# Altium PCB fpga_v3.PcbDoc (part 2 of 3)
Units mm, origin at the board's own origin, x right, y up, seen from the top; angles counter-clockwise.
Board outline 160 x 147 mm, 2 copper layers (Top Layer, Bottom Layer); 241 components, 277 nets, 981 pads, 212 vias.
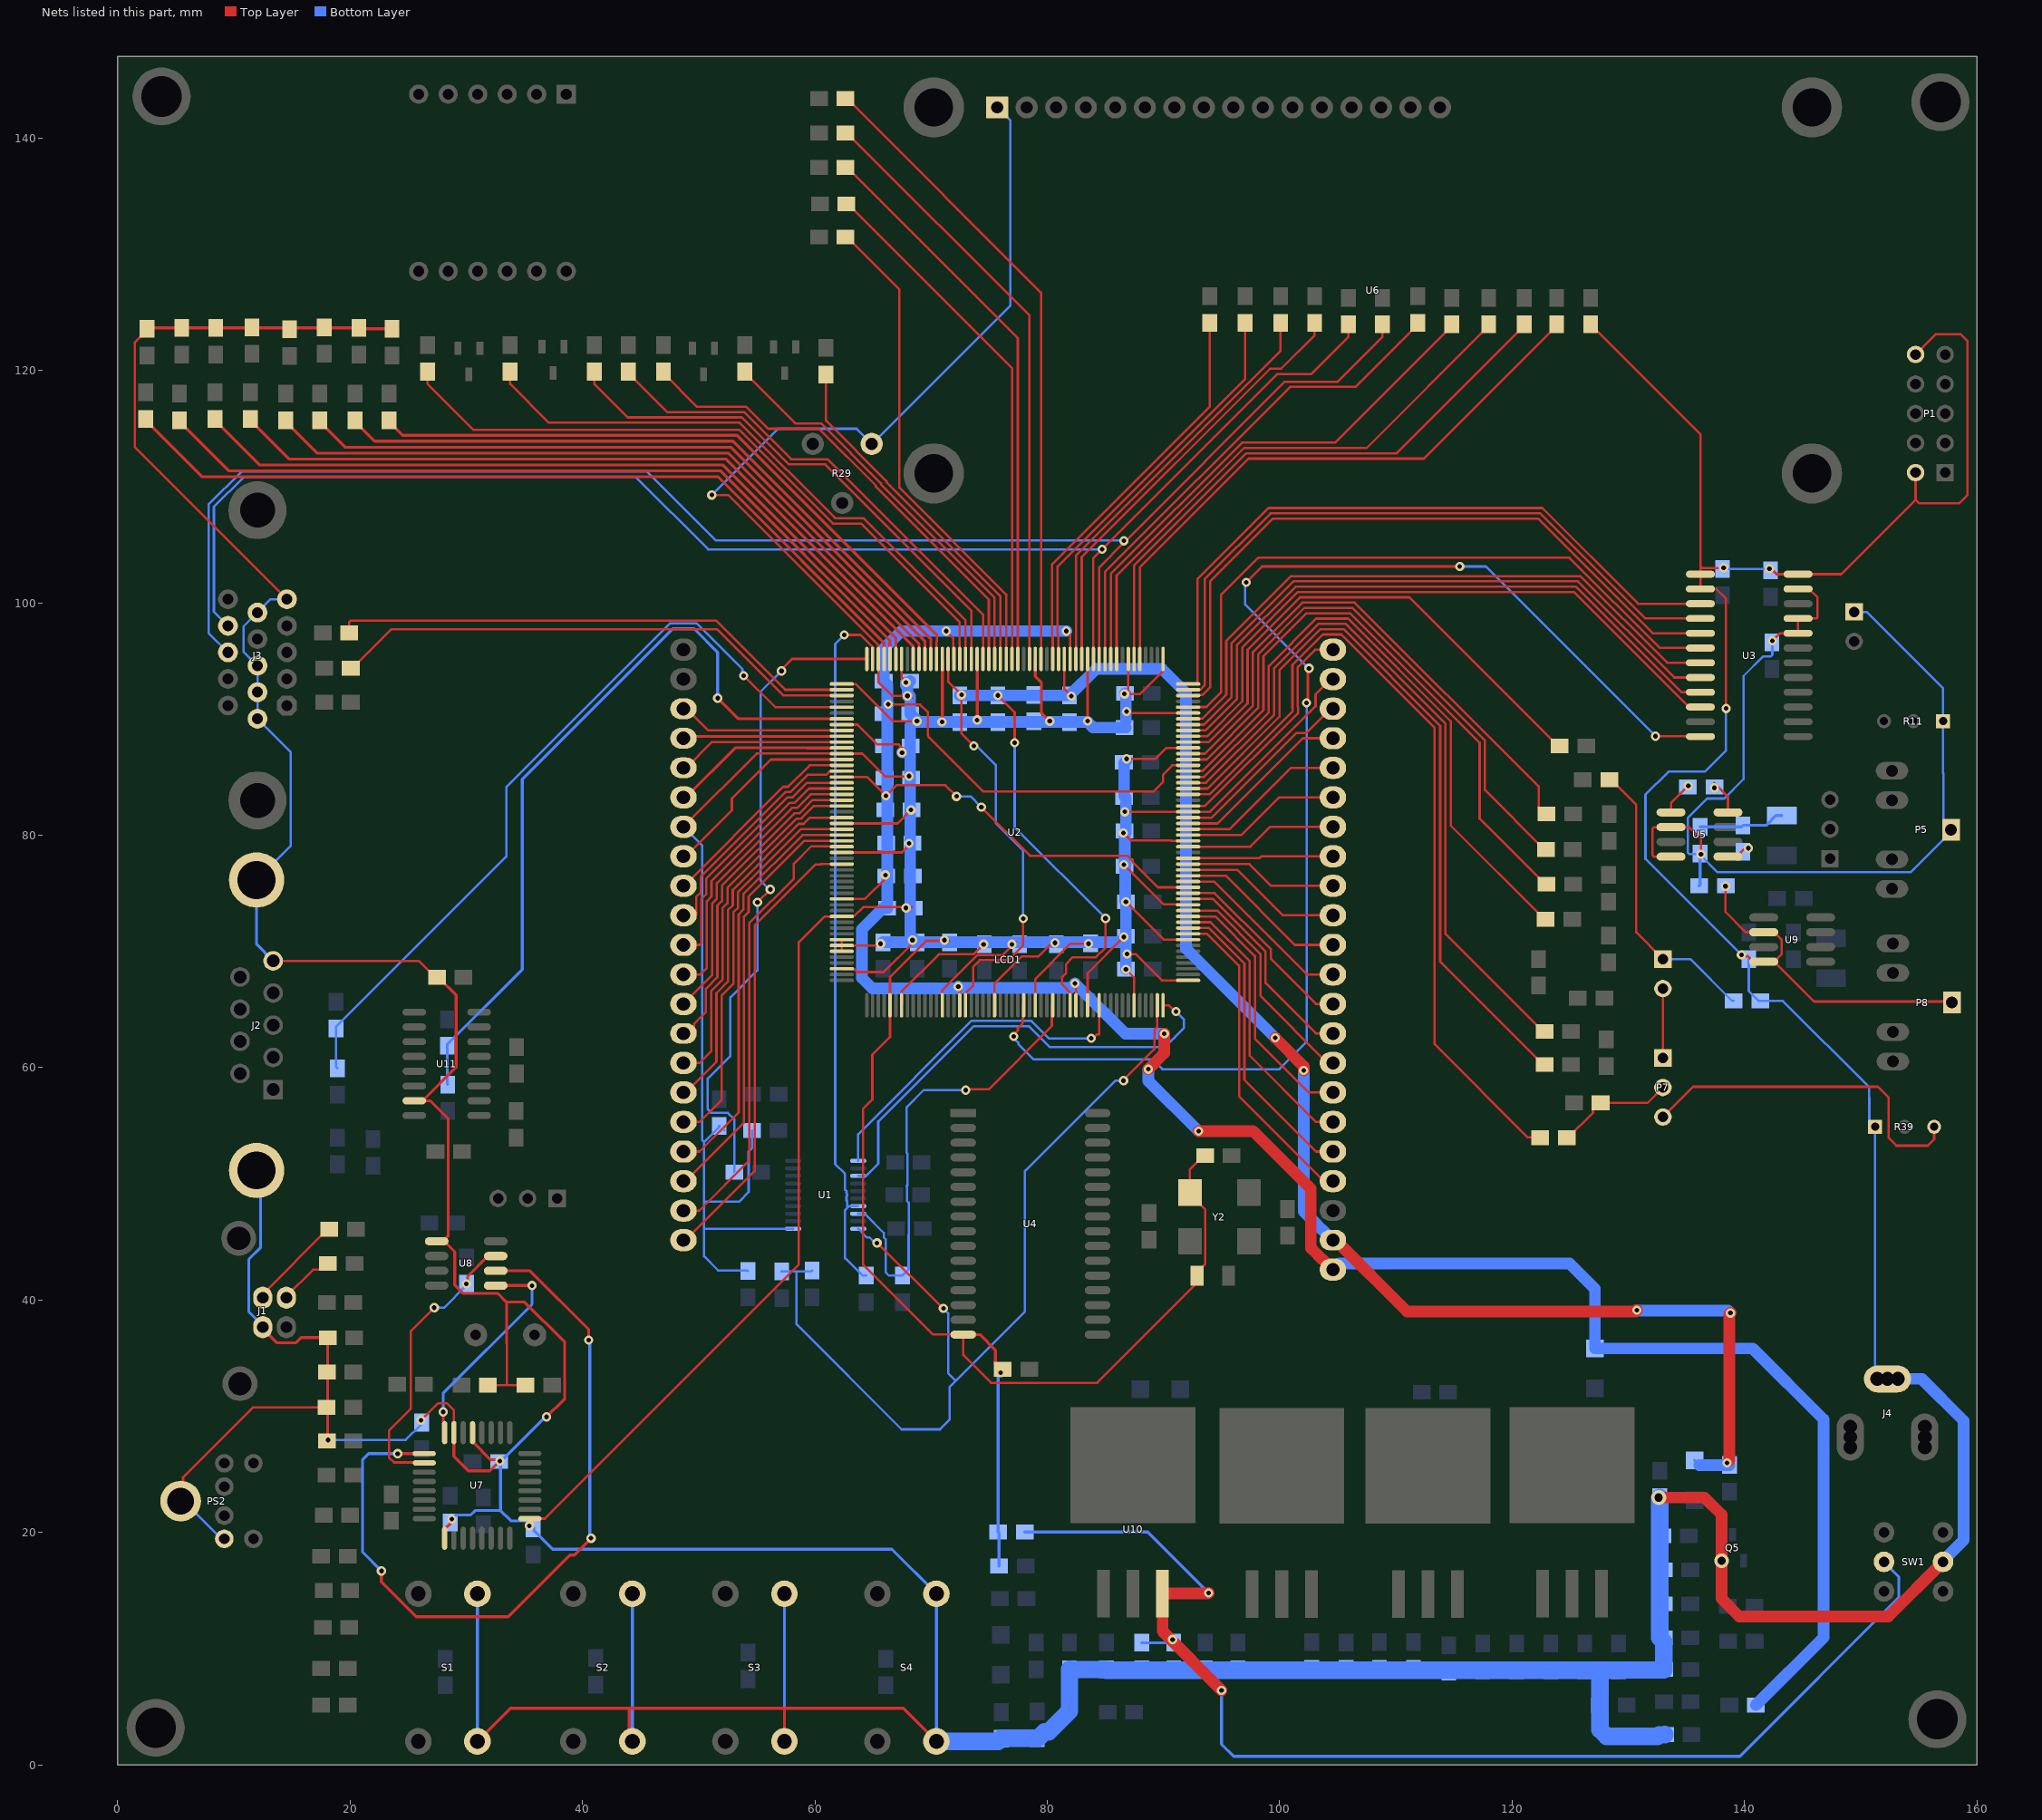
[diagram p2: the nets of this part, all layers, seen from the top]

## Via types
v1: diameter 0.8, hole 0.4, Top Layer to Bottom Layer, 210 vias
v2: diameter 1.27, hole 0.711, Top Layer to Bottom Layer, 2 vias

## Nets (pads, with @x,y where several pads share a name; then routed paths per layer and width w, separated by ;. In a path a pad name is that pad's centre, name@x,y a point inside that pad or via, vN(x,y) a via of type N, cw(c..) or ccw(c..) an arc to the next point about the centre after c; other vN are vias at no path point) (continued)
ADC_CLK: U2.80 U3.12 | length 118.2
  Top Layer w0.203: v1(77.106,62.683) 77.106,62.845 77.465,63.204 77.465,63.397 77.875,63.807 77.875,64.234 77.918,64.277 77.918,64.63 77.923,64.636 77.923,65.321 U2.80@77.966,65.364 ; v1(97.118,101.764) 97.765,102.411 98.478,103.124 v1(115.494,103.124) ; v1(102.311,91.389) 102.422,91.5 102.422,94.269 v1(102.514,94.361) ; v1(132.334,88.519) 132.35,88.503 136.185,88.503 U3.12@136.2,88.488
  Bottom Layer w0.203: v1(77.106,62.683) 77.106,62.56 77.509,62.157 77.509,62.013 78.803,60.719 89.056,60.719 89.904,59.87 99.977,59.87 102.311,62.205 v1(102.311,91.389) ; v1(97.118,101.764) 97.028,101.674 97.028,99.847 v1(102.514,94.361) ; v1(115.494,103.124) 117.729,103.124 v1(132.334,88.519)
ADC_D0: U2.156 U3.3 | length 59
  Top Layer w0.203: U2.156@92.116,93.014 92.87,93.014 92.914,93.059 92.914,102.042 99.025,108.153 122.599,108.153 130.835,99.918 U3.3@136.2,99.918
ADC_D1: U2.155 U3.4 | length 59.5
  Top Layer w0.203: U2.155@92.116,92.514 92.135,92.533 93.173,92.533 93.548,92.908 93.548,102.03 99.215,107.696 122.41,107.696 131.458,98.648 U3.4@136.2,98.648
ADC_D2: U2.154 U3.5 | length 59.8
  Top Layer w0.203: U2.154@92.116,92.014 92.135,92.033 92.735,92.033 92.735,92.062 93.203,92.062 93.216,92.075 93.363,92.075 94.031,92.744 94.031,101.866 99.404,107.239 122.22,107.239 132.082,97.378 U3.5@136.2,97.378
ADC_D3: U2.152 U3.6 | length 57.6
  Top Layer w0.203: U2.152@92.116,91.014 92.135,91.033 93.7,91.033 94.945,92.278 94.945,100.66 98.146,103.861 98.146,103.88 124.933,103.88 132.705,96.108 U3.6@136.2,96.108
ADC_D4: U2.150 U3.7 | length 55
  Top Layer w0.203: U2.150@92.116,90.014 92.135,90.033 93.346,90.033 95.402,92.089 95.402,96.71 100.991,102.298 125.867,102.298 133.328,94.838 U3.7@136.2,94.838
ADC_D5: U2.149 U3.8 | length 55.3
  Top Layer w0.203: U2.149@92.116,89.514 93.474,89.514 95.86,91.899 95.86,96.52 101.181,101.841 125.678,101.841 133.952,93.568 U3.8@136.2,93.568
ADC_D6: U2.148 U3.9 | length 55.7
  Top Layer w0.203: U2.148@92.116,89.014 93.621,89.014 96.317,91.71 96.317,96.331 101.37,101.384 125.489,101.384 134.575,92.298 U3.9@136.2,92.298
ADC_D7: U2.147 U3.10 | length 56
  Top Layer w0.203: U2.147@92.116,88.514 93.767,88.514 96.774,91.521 96.774,96.142 101.559,100.927 125.299,100.927 135.199,91.028 U3.10@136.2,91.028
ADC_GND: C22.1 L1.2 P2.1 P5.1 R10.1 R11.1 U3.20 U3.21 U3.23 U5.2 U5.4 | length 92.1
  Top Layer w0.203: U5.4@133.669,78.156 132.199,78.156 132.08,78.275 132.08,80.577 132.199,80.696 135.223,80.696 136.246,79.674 v1(136.246,78.359) ; v1(142.392,96.723) 143.047,97.378 U3.20@144.6,97.378 U3.21@144.6,98.648 146.155,98.648 146.274,98.767 146.274,100.464 145.55,101.188 U3.23@144.6,101.188
  Bottom Layer w0.203: R10.1@136.169,78.359 136.169,78.308 137.668,76.81 154.292,76.81 157.759,80.277 P5.1@157.759,80.467 157.099,81.128 157.099,85.304 157.074,85.33 157.074,92.622 150.483,99.212 P2.1@149.428,99.212 ; v1(136.246,78.359) 136.22,78.384 135.23,78.384 135.111,78.503 135.111,81.486 136.781,83.156 138.244,83.156 139.913,84.825 139.913,93.705 141.582,95.374 142.237,95.374 142.392,95.529 v1(142.392,96.723)
  Bottom Layer w0.254: L1.2@136.093,75.641 136.169,75.717 R10.1@136.169,78.308
AN0: R74.2 U2.186 | length 34.9
  Top Layer w0.203: R74.2@53.975,119.888 53.975,119.761 58.306,115.43 60.548,115.43 65.707,110.272 65.707,110.176 75.466,100.417 U2.186@75.466,95.164
AN1: R64.2 U2.190 | length 45.7
  Top Layer w0.203: R64.2@41.021,119.888 41.021,118.821 43.891,115.951 53.719,115.951 57.77,111.9 60.892,111.9 73.466,99.326 U2.190@73.466,95.164
AN2: R60.2 U2.191 | length 52
  Top Layer w0.203: R60.2@33.782,119.888 33.782,118.821 37.109,115.494 53.529,115.494 61.746,107.277 64.159,107.277 72.966,98.47 U2.191@72.966,95.164
AN3: R52.2 U2.185 | length 30.7
  Top Layer w0.203: R52.2@60.96,119.634 60.96,115.665 66.164,110.461 66.164,110.365 75.966,100.564 U2.185@75.966,95.164
ANALOG_OUT: P7.2 R12.1 R19.2 | length 10.3
  Top Layer w0.203: R19.2@124.689,53.975 124.816,53.975 126.949,56.109 126.949,56.439 127.483,56.972 131.648,56.972 P7.2@132.969,58.293
ANALOG_OUT1: P7.3 R39.3 | length 29.9
  Top Layer w0.203: P7.3@132.969,55.753 135.576,58.36 151.471,58.36 152.4,57.43 152.4,53.955 153.06,53.294 153.06,53.289 155.753,53.289 156.312,53.848 R39.3@156.312,54.915
ANALOG_OUT2: P6.2 P7.1 | length 6
  Top Layer w0.203: P7.1@132.969,60.833 P6.2@132.969,66.802
BLUE: R65.1 U2.2 | length 45.8
  Top Layer w0.203: R65.1@19.939,97.409 19.939,98.349 20.058,98.468 51.493,98.468 57.447,92.514 U2.2@62.316,92.514
CA: R51.2 U2.187 | length 41.4
  Top Layer w0.203: R51.2@46.965,119.888 46.965,119.761 49.86,116.865 54.098,116.865 55.99,114.973 60.359,114.973 65.25,110.082 65.25,109.987 74.966,100.27 U2.187@74.966,95.164
CB: R53.2 U2.192 | length 58.5
  Top Layer w0.203: R53.2@26.67,119.888 26.67,118.821 30.607,114.884 53.492,114.884 61.557,106.82 63.97,106.82 72.466,98.324 U2.192@72.466,95.164
CC: R54.2 U2.184 | length 42.1
  Top Layer w0.203: R54.2@62.636,131.47 62.763,131.47 67.275,126.958 67.275,109.901 76.466,100.71 U2.184@76.466,95.164
CD: R55.2 U2.183 | length 45.1
  Top Layer w0.203: R55.2@62.713,134.315 62.84,134.315 76.966,120.189 U2.183@76.966,95.164
CE: R56.2 U2.182 | length 48.5
  Top Layer w0.203: R56.2@62.636,137.465 62.763,137.465 77.466,122.762 U2.182@77.466,95.164
CF: R57.2 U2.188 | length 43.1
  Top Layer w0.203: R57.2@43.942,119.888 43.942,119.761 47.295,116.408 53.908,116.408 57.959,112.357 61.082,112.357 74.466,98.973 U2.188@74.466,95.164
CG: R58.2 U2.180 | length 51.9
  Top Layer w0.203: R58.2@62.636,140.411 62.763,140.411 78.466,124.709 U2.180@78.466,95.164
D+: J1.3 R30.1 | length 8.3
  Top Layer w0.203: J1.3@12.497,40.208 12.497,40.513 18.085,46.101 R30.1@18.212,46.101
D-: J1.2 R28.1 | length 4.9
  Top Layer w0.203: J1.2@14.529,40.208 14.529,40.335 16.815,42.621 17.577,42.621 R28.1@18.11,43.155
DAC_D0: R27.1 U2.146 | length 45.1
  Top Layer w0.203: U2.146@92.116,88.014 93.914,88.014 97.231,91.331 97.231,95.952 101.749,100.47 111.163,100.47 123.952,87.681 R27.1@124.079,87.681
DAC_D1: R25.1 U2.144 | length 47.5
  Top Layer w0.203: U2.144@92.116,87.014 93.56,87.014 97.688,91.142 97.688,95.763 101.938,100.013 106.44,100.013 122.301,84.152 122.301,82.372 122.834,81.839 R25.1@122.961,81.839
DAC_D2: R24.1 U2.143 | length 50
  Top Layer w0.203: U2.143@92.116,86.514 93.707,86.514 98.146,90.953 98.146,95.573 102.127,99.555 106.251,99.555 117.653,88.154 117.653,83.896 122.784,78.765 R24.1@122.911,78.765
DAC_D3: R23.1 U2.141 | length 52.7
  Top Layer w0.203: U2.141@92.116,85.514 92.135,85.533 93.372,85.533 98.603,90.763 98.603,95.384 102.317,99.098 106.062,99.098 117.196,87.964 117.196,81.432 122.834,75.794 R23.1@122.961,75.794
DAC_D4: R22.1 U2.140 | length 54.7
  Top Layer w0.203: U2.140@92.116,85.014 93.5,85.014 99.06,90.574 99.06,94.561 103.139,98.641 105.872,98.641 114.723,89.79 114.723,80.806 122.758,72.771 R22.1@122.885,72.771
DAC_D5: R21.1 U2.139 | length 63.8
  Top Layer w0.203: U2.139@92.116,84.514 93.647,84.514 99.517,90.384 99.517,94.372 103.329,98.184 105.683,98.184 114.266,89.601 114.266,71.51 122.657,63.119 R21.1@122.784,63.119
DAC_D6: R20.1 U2.138 | length 66.1
  Top Layer w0.203: U2.138@92.116,84.014 93.793,84.014 99.974,90.195 99.974,94.183 103.518,97.727 105.494,97.727 113.808,89.412 113.808,69.122 122.657,60.274 R20.1@122.784,60.274
DAC_D7: R19.1 U2.137 | length 72.2
  Top Layer w0.203: U2.137@92.116,83.514 93.94,83.514 101.117,90.691 101.117,90.868 101.098,90.887 101.098,94.66 103.708,97.269 105.304,97.269 113.32,89.253 113.32,62.016 121.336,54 122.377,54 R19.1@122.403,53.975
DAC_GND: L3.2 P6.1 R26.1 | length 25
  Top Layer w0.203: R26.1@128.372,84.785 128.499,84.785 130.676,82.608 130.676,71.635 P6.1@132.969,69.342
  Bottom Layer w0.203: P6.1@132.969,69.342 135.331,69.342 138.938,65.735 L3.2@139.065,65.735
DC_IN: C41.1 C42.1 C55.2 SW1.4 U10.3 | length 107.4
  Top Layer w1: v1(93.878,14.808) 93.828,14.757 U10.3@89.916,14.757 89.916,11.506 v1(94.996,6.426)
  Bottom Layer w0.254: C55.2@78.054,20.041 88.646,20.041 v1(93.878,14.808) ; C41.1@88.138,10.516 C42.1@90.5,10.516 ; v1(94.996,6.426) 94.996,1.778 96.037,0.737 139.591,0.737 153.264,14.409 153.264,16.205 SW1.4@151.994,17.475
  other v1: 90.78,10.795
DEV_1: LCD1.3 U2.9 | length 14.4
  Top Layer w0.203: LCD1.3@48.692,90.881 48.946,90.881 50.813,89.014 U2.9@62.316,89.014
DEV_2: LCD1.4 U2.10 | length 13.7
  Top Layer w0.203: LCD1.4@48.692,88.341 48.846,88.495 62.297,88.495 U2.10@62.316,88.514
DEV_3: LCD1.5 U2.11 | length 14.5
  Top Layer w0.203: LCD1.5@48.692,85.801 48.946,85.801 51.159,88.014 U2.11@62.316,88.014
DEV_4: LCD1.6 U2.12 | length 15.4
  Top Layer w0.254: LCD1.6@48.692,83.261 48.882,83.261 53.139,87.518 59.354,87.518 59.357,87.514 U2.12@62.316,87.514
DEV_5: LCD1.8 U2.14 | length 17.7
  Top Layer w0.203: LCD1.8@48.692,78.181 48.882,78.181 52.86,82.159 52.86,83.155 56.219,86.514 58.395,86.514 U2.14@62.316,86.514
DEV_6: LCD1.9 U2.15 | length 17.9
  Top Layer w0.203: LCD1.9@48.692,75.641 48.754,75.641 57.284,84.172 57.705,84.172 59.547,86.014 U2.15@62.316,86.014
DEV_7: LCD1.10 U2.16 | length 20.5
  Top Layer w0.203: LCD1.10@48.692,73.101 49.784,73.101 49.784,74.693 50.19,75.099 50.19,76.431 57.474,83.714 57.894,83.714 59.381,85.201 60.964,85.201 61.229,85.466 62.121,85.466 62.127,85.471 62.316,85.471 U2.16@62.316,85.514
DEV_8: LCD1.11 U2.18 | length 22.4
  Top Layer w0.203: LCD1.11@48.692,70.561 50.071,70.561 50.241,70.731 50.241,74.504 50.648,74.91 50.648,76.242 57.663,83.257 58.084,83.257 59.34,84.514 U2.18@62.316,84.514
DEV_9: LCD1.12 U2.19 | length 24.4
  Top Layer w0.203: LCD1.12@48.692,68.021 50.14,68.021 50.698,68.58 50.698,74.314 51.105,74.721 51.105,76.052 57.852,82.8 58.273,82.8 59.487,84.014 U2.19@62.316,84.014
DEV_10: LCD1.13 U2.20 | length 25.5
  Top Layer w0.203: LCD1.13@48.692,65.481 48.692,65.504 51.156,67.968 51.156,74.125 51.562,74.531 51.562,75.863 58.042,82.343 58.462,82.343 59.634,83.514 U2.20@62.316,83.514
DEV_11: LCD1.14 U2.21 | length 28.2
  Top Layer w0.203: LCD1.14@48.692,62.941 49.733,62.941 49.733,63.267 49.608,63.392 49.608,63.771 49.876,64.039 50.622,64.785 50.622,66.788 51.613,67.779 51.613,73.935 52.019,74.342 52.019,75.674 58.231,81.886 58.652,81.886 59.78,83.014 U2.21@62.316,83.014
DEV_12: LCD1.15 U2.22 | length 30.2
  Top Layer w0.203: LCD1.15@48.692,60.401 50.071,60.401 51.079,61.409 51.079,66.599 52.07,67.589 52.07,73.746 52.476,74.152 52.476,75.484 58.42,81.428 58.841,81.428 59.927,82.514 U2.22@62.316,82.514
DEV_13: LCD1.16 U2.24 | length 31.3
  Top Layer w0.203: LCD1.16@48.692,57.861 48.882,57.861 51.537,60.515 51.537,66.409 52.527,67.4 52.527,73.557 52.934,73.963 52.934,75.295 58.61,80.971 59.03,80.971 59.573,81.514 U2.24@62.316,81.514
DEV_14: LCD1.17 U2.26 | length 33.7
  Top Layer w0.203: LCD1.17@48.692,55.321 50.071,55.321 51.994,57.244 51.994,66.22 52.984,67.211 52.984,73.367 53.391,73.774 53.391,75.106 58.799,80.514 59.22,80.514 U2.26@62.316,80.514
DEV_15: LCD1.18 U2.27 | length 35.7
  Top Layer w0.203: LCD1.18@48.692,52.781 50.071,52.781 53.442,56.151 53.442,67.021 53.442,73.178 53.848,73.584 53.848,74.916 58.946,80.014 59.366,80.014 U2.27@62.316,80.014
DEV_16: LCD1.19 U2.28 | length 36.9
  Top Layer w0.203: LCD1.19@48.692,50.241 48.882,50.241 53.899,55.258 53.899,72.989 54.077,73.166 54.305,73.395 54.305,74.727 59.092,79.514 U2.28@62.316,79.514
DEV_17: LCD1.20 U2.29 | length 39.4
  Top Layer w0.203: LCD1.20@48.692,47.701 50.071,47.701 54.356,51.986 54.356,72.423 58.185,76.252 58.185,77.539 59.702,79.057 61.347,79.057 61.39,79.014 U2.29@62.316,79.014
DEV_18: LCD1.22 U2.135 | length 20.4
  Top Layer w0.203: U2.135@92.116,82.514 93.587,82.514 101.575,90.502 101.575,91.057 101.556,91.076 101.556,94.471 103.046,95.961 LCD1.22@104.572,95.961
DEV_19: LCD1.24 U2.133 | length 16.3
  Top Layer w0.203: U2.133@92.116,81.514 94.147,81.514 101.432,88.798 102.298,88.798 104.381,90.881 LCD1.24@104.572,90.881
DEV_20: LCD1.25 U2.132 | length 15.5
  Top Layer w0.203: U2.132@92.116,81.014 94.664,81.014 101.992,88.341 LCD1.25@104.572,88.341
DEV_21: LCD1.26 U2.131 | length 14.6
  Top Layer w0.203: U2.131@92.116,80.514 95.684,80.514 100.972,85.801 LCD1.26@104.572,85.801
DEV_22: LCD1.27 U2.130 | length 13.8
  Top Layer w0.203: U2.130@92.116,80.014 96.704,80.014 99.952,83.261 LCD1.27@104.572,83.261
DEV_23: LCD1.28 U2.128 | length 13.2
  Top Layer w0.203: U2.128@92.116,79.014 97.474,79.014 99.182,80.721 LCD1.28@104.572,80.721
DEV_24: LCD1.29 U2.126 | length 12.5
  Top Layer w0.203: U2.126@92.116,78.014 98.244,78.014 98.412,78.181 LCD1.29@104.572,78.181
DEV_25: LCD1.30 U2.125 | length 13.2
  Top Layer w0.203: U2.125@92.116,77.514 97.392,77.514 99.264,75.641 LCD1.30@104.572,75.641
DEV_26: LCD1.31 U2.124 | length 14.1
  Top Layer w0.203: U2.124@92.116,77.014 96.372,77.014 100.284,73.101 LCD1.31@104.572,73.101
DEV_27: LCD1.32 U2.123 | length 14.9
  Top Layer w0.203: U2.123@92.116,76.514 95.352,76.514 101.304,70.561 LCD1.32@104.572,70.561
DEV_28: LCD1.33 U2.122 | length 15.8
  Top Layer w0.203: U2.122@92.116,76.014 94.332,76.014 102.324,68.021 LCD1.33@104.572,68.021
DEV_29: LCD1.34 U2.120 | length 16.9
  Top Layer w0.203: U2.120@92.116,75.014 94.402,75.014 99.246,70.17 99.246,69.359 103.124,65.481 LCD1.34@104.572,65.481
DEV_30: LCD1.35 U2.119 | length 18.8
  Top Layer w0.203: U2.119@92.116,74.514 94.255,74.514 98.789,69.98 98.789,67.276 103.124,62.941 LCD1.35@104.572,62.941
DEV_31: LCD1.36 U2.117 | length 20
  Top Layer w0.203: U2.117@92.116,73.514 94.608,73.514 98.332,69.791 98.332,66.184 104.115,60.401 LCD1.36@104.572,60.401
DEV_32: LCD1.37 U2.116 | length 22.9
  Top Layer w0.203: U2.116@92.116,73.014 94.462,73.014 97.874,69.601 97.874,62.476 102.489,57.861 LCD1.37@104.572,57.861
DEV_33: LCD1.38 U2.115 | length 24.3
  Top Layer w0.203: U2.115@92.116,72.514 94.051,72.514 97.417,69.148 97.417,61.028 103.124,55.321 LCD1.38@104.572,55.321
DEV_34: LCD1.39 U2.114 | length 26.3
  Top Layer w0.203: U2.114@92.116,72.014 93.904,72.014 96.96,68.959 96.96,58.945 103.124,52.781 LCD1.39@104.572,52.781
DEV_35: LCD1.40 U2.113 | length 27.9
  Top Layer w0.203: U2.113@92.116,71.514 93.758,71.514 96.503,68.769 96.503,57.523 103.784,50.241 LCD1.40@104.572,50.241
DP: R59.2 U2.178 | length 55.3
  Top Layer w0.203: R59.2@62.636,143.383 62.763,143.383 79.466,126.68 U2.178@79.466,95.164
EECS: U7.32 U8.1 | length 18.9
  Top Layer w0.254: v1(28.016,30.378) 28.016,29.556 28.145,29.427 U7.32@28.145,28.599 ; U8.1@32.537,41.25 v1(35.662,41.25)
  Bottom Layer w0.254: v1@28.156,30.543 28.103,30.543 28.016,30.631 28.016,31.991 35.662,39.637 v1(35.662,41.25)
EEDATA: R43.2 U7.2 U8.3 | length 24.9
  Top Layer w0.203: U7.2@26.391,25.995 26.358,26.029 23.792,26.029 23.349,26.471 23.349,28.757 25.245,30.653 25.245,37.335 v1(27.254,39.345)
  Top Layer w0.254: v1@30.124,41.681 30.124,42.037 31.877,43.79 U8.3@32.537,43.79
  Bottom Layer w0.203: v1(27.254,39.345) 28.092,39.345 30.023,41.275 v1(30.023,41.402)
EESK: U7.1 U8.2 | length 66.9
  Top Layer w0.254: v1(22.708,16.688) 22.708,15.752 25.709,12.751 33.601,12.751 38.909,18.059 39.296,18.059 v1(40.742,19.506) ; v1(24.105,26.784) 24.11,26.79 26.385,26.79 U7.1@26.391,26.795 ; U8.2@32.537,42.52 35.496,42.52 40.538,37.477 v1(40.538,36.551)
  Bottom Layer w0.254: v1(22.708,16.688) 21.087,18.308 21.087,26.275 21.597,26.784 v1(24.105,26.784) ; v1(40.538,36.551) 40.64,36.449 40.64,19.608 v1(40.742,19.506)
ForClock: LCD1.21 U2.32 | length 39.4
  Top Layer w0.203: LCD1.21@48.692,45.161 48.882,45.161 54.813,51.092 54.813,72.234 60.071,77.492 60.522,77.492 60.544,77.514 U2.32@62.316,77.514
FPGA-CCLK: U1.3 U2.104 | length 39.9
  Top Layer w0.203: U2.104@89.966,65.364 90.462,65.364 90.995,64.83 v1(91.068,64.83)
  Bottom Layer w0.203: U1.3@63.729,50.687 64.403,50.687 65.456,51.74 65.456,55.36 73.654,63.559 78.441,63.559 80.232,61.767 90.114,61.767 90.407,62.06 90.424,62.06 90.926,62.561 90.926,62.579 91.745,63.398 91.745,64.154 v1(91.068,64.83)
FPGA-DIN: U1.1 U2.93 | length 30.3
  Top Layer w0.203: v1(83.781,62.523) 83.943,62.523 84.296,62.876 84.466,62.876 U2.93@84.466,65.364
  Bottom Layer w0.203: U1.1@63.729,51.987 63.729,54.28 73.465,64.016 78.63,64.016 80.123,62.523 v1(83.781,62.523)
FPGA-DONE: R1.1 R9.2 U1.10 U2.103 | length 84.8
  Top Layer w0.203: v1(65.348,44.914) 65.387,44.914 71.018,39.282 v1(71.057,39.282) ; v1(86.563,58.882) 86.563,58.935 89.214,61.586 89.214,63.27 89.466,63.522 U2.103@89.466,65.364
  Bottom Layer w0.203: R9.2@57.15,42.469 58.42,42.469 ; R1.1@59.766,42.545 59.69,42.469 58.42,42.469 ; U1.10@63.729,46.137 64.459,45.406 64.693,45.406 65.186,44.914 v1(65.348,44.914) ; v1(71.057,39.282) 71.476,38.864 71.476,33.706 72.123,33.058 ; v1(86.563,58.882) 85.857,58.882 78.08,51.105 78.08,39.014 72.123,33.058 ; 58.42,42.469 58.42,37.922 67.462,28.88 70.764,28.88 71.603,29.718 71.603,32.537 72.123,33.058
FPGA-INITb: R2.1 U1.8 U2.85 | length 39.6
  Top Layer w0.203: v1@73.304,58.141 74.953,58.141 80.391,63.578 80.391,64.25 80.418,64.277 80.418,65.169 80.423,65.175 80.423,65.321 U2.85@80.466,65.364
  Bottom Layer w0.203: U1.8@63.729,47.437 64.278,47.437 65.942,45.773 65.942,45.388 66.103,45.227 66.103,42.38 66.37,42.113 R2.1@67.539,42.113 68.069,42.643 68.069,45.615 68.097,45.644 68.097,48.265 68.075,48.287 68.075,48.381 67.916,48.539 67.916,49.807 67.904,49.819 67.967,49.882 67.967,52.601 67.894,52.674 67.894,56.591 69.367,58.064 v1(72.974,58.064)
FPGA-PROGb: R3.1 U1.7 U2.207 | length 61.8
  Top Layer w0.203: v1(62.535,97.231) 63.937,97.231 64.918,96.251 64.918,95.89 64.966,95.841 U2.207@64.966,95.164
  Bottom Layer w0.203: v1(62.535,97.231) 61.747,96.444 61.747,51.705 62.556,50.897 62.603,50.85 62.603,49.487 62.727,49.363 62.727,49.189 62.774,49.142 62.774,48.982 62.727,48.934 62.727,48.539 62.774,48.492 62.774,47.915 ; U1.7@63.729,48.087 62.946,48.087 62.774,47.915 ; R3.1@64.414,42.113 64.11,42.113 62.603,43.62 62.603,47.744 62.774,47.915
FPGA-TDI: R8.1 U2.208 | length 56.2
  Top Layer w0.203: v1(55.061,74.219) 55.061,74.228 56.159,75.327 v1(56.159,75.336) ; v1@56.82,93.955 58.029,95.164 U2.208@64.466,95.164
  Bottom Layer w0.203: R8.1@53.086,51.003 53.086,55.55 52.527,56.109 51.079,56.109 50.927,56.261 50.927,56.292 50.829,56.39 50.775,56.445 50.775,59.055 52.73,61.011 52.73,66.04 55.061,68.37 v1(55.061,74.219) ; v1@55.956,75.463 55.332,76.088 55.332,92.34 v1(57.125,94.132)
FPGA_1.25V: C2.2 C3.2 C4.2 C5.2 L9.2 LCD1.42 R98.1 U2.70 U2.88 U2.174 U2.194 | length 200
  Top Layer w0.203: U2.194@71.466,95.164 71.466,93.228 v1(72.619,92.075) 72.619,88.748 v1(73.685,87.681) ; U2.70@72.966,65.364 72.966,65.549 73.014,65.598 73.014,66.451 73.609,67.046 73.609,68.67 74.18,69.24 76.659,69.24 77.275,69.856 77.927,70.509 v1(77.927,72.831) ; v1(75.743,92.024) 77.191,90.576 v1(77.191,87.96) ; U2.174@81.466,95.164 81.466,92.575 v1(82.067,91.973) ; U2.88@81.966,65.364 81.966,66.472 81.28,67.158 81.28,67.791 81.604,68.115 81.604,68.904 82.194,69.494 84.176,69.494 85.014,70.333 v1(85.014,72.847) ; LCD1.42@104.572,45.161 LCD1.42@104.826,45.161 ; v1(138.481,25.984) v1@138.684,26.187
  Top Layer w1: v1(99.619,62.56) 102.057,60.122 v1(102.057,59.766) ; LCD1.42@104.826,45.161 110.965,39.022 130.615,39.022 v1(130.734,39.141) ; v1@138.684,26.187 138.684,38.786 v1(138.786,38.887)
  Bottom Layer w0.203: v1@73.609,88.011 75.565,86.055 75.565,81.051 77.927,78.689 v1(77.927,72.831) ; v1(77.191,87.96) 77.191,80.67 v1(85.014,72.847)
  Bottom Layer w0.254: L9.2@135.687,26.213 L9.2@136.093,25.806
  Bottom Layer w1: C5.2@72.466,92.024 v1(75.743,92.024) C2.2@81.915,92.024 84.201,94.31 89.865,94.31 91.923,92.253 91.923,70.256 v1(99.619,62.56) ; v1(102.057,59.766) 102.057,47.638 102.902,46.793 103.637,46.058 103.675,46.058 LCD1.42@104.572,45.161 ; v1(130.734,39.141) 130.785,39.091 138.582,39.091 v1(138.786,38.887) ; L9.2@136.093,25.806 R98.1@138.709,25.806
FPGA_2.5V: C6.2 C7.2 C8.2 C9.2 C10.2 C11.2 C12.2 C13.2 D13.1 L7.2 LCD1.43 U2.17 U2.38 U2.69 U2.89 U2.121 U2.142 U2.173 U2.193 | length 261.4
  Top Layer w0.203: U2.38@62.316,74.514 64.303,74.514 v1@66.218,76.429 ; U2.17@62.316,85.014 64.49,85.014 v1(66.116,83.388) 67.031,84.303 71.222,84.303 v1(72.187,83.337) ; v1(66.308,91.276) 66.308,91.237 69.05,91.237 69.729,90.557 69.729,88.603 69.748,88.584 69.748,88.494 74.488,83.754 89.138,83.754 89.967,84.582 89.967,85.217 90.764,86.014 U2.142@92.116,86.014 ; v1@71.291,97.555 71.918,96.928 71.918,95.359 71.923,95.353 71.923,95.207 U2.193@71.966,95.164 ; v1(72.338,66.977) 72.338,66.865 72.484,66.719 72.484,66.591 72.466,66.573 U2.69@72.466,65.364 ; v1(74.32,82.423) 78.518,78.226 86.902,78.226 87.344,77.783 87.344,77.68 89.51,75.514 U2.121@92.116,75.514 ; v1(81.636,97.561) 81.966,97.231 U2.173@81.966,95.164 ; v1(82.387,67.248) 82.466,67.248 U2.89@82.466,65.364
  Top Layer w1: v1(88.701,59.863) 90.07,61.232 v1(90.07,62.916) ; v1(93.015,54.534) 93.269,54.534 95.292,54.534 97.714,54.534 102.675,49.573 102.675,49.09 102.675,45.128 102.675,44.481 102.839,44.317 103.637,43.518 103.675,43.518 LCD1.43@104.572,42.621
  Bottom Layer w0.203: v1(72.187,83.337) 73.406,83.337 v1(74.32,82.423)
  Bottom Layer w1: v1(66.308,91.276) v1@66.228,91.276 ; v1@70.942,97.561 67.437,97.561 65.923,96.047 C6.2@65.923,93.25 66.228,92.945 v1@66.228,91.276 ; v1(71.298,97.561) v1(81.636,97.561) ; v1(72.338,66.977) 72.189,66.827 64.948,66.827 64.059,67.716 64.059,71.907 65.869,73.718 C13.2@66.228,73.718 66.228,91.196 66.243,91.211 66.228,91.227 v1@66.228,91.276 ; 72.746,66.853 81.991,66.853 v1(82.387,67.248) 86.719,62.916 v1(90.07,62.916) ; v1(88.701,59.863) 88.701,58.847 v1(93.015,54.534) ; LCD1.43@104.572,42.621 105.105,43.155 124.943,43.155 127.127,40.97 L7.2@127.127,35.839 140.691,35.839 146.787,29.743 146.787,10.96 D13.1@140.97,5.143
  other v1: 66.065,76.581
FPGA_LED1: R66.1 U2.205 | length 73
  Top Layer w0.254: R66.1@2.413,115.824 2.413,115.697 7.264,110.846 51.652,110.846 65.943,96.555 65.943,96.099 65.966,96.076 U2.205@65.966,95.164
FPGA_LED2: R67.1 U2.204 | length 69.5
  Top Layer w0.254: R67.1@5.334,115.697 5.334,115.57 9.55,111.354 51.863,111.354 66.451,96.765 66.451,96.291
FPGA_LED3: R68.1 U2.203 | length 68.3
  Top Layer w0.254: R68.1@8.382,115.824 8.382,115.697 12.217,111.862 52.073,111.862 66.966,96.969 U2.203@66.966,95.164
FPGA_LED4: R69.1 U2.200 | length 66.3
  Top Layer w0.254: R69.1@11.43,115.824 11.43,115.697 14.757,112.37 52.335,112.37 68.443,96.262 68.443,96.099 68.457,96.085 68.457,95.173 U2.200@68.466,95.164
FPGA_LED5: R70.1 U2.199 | length 62.8
  Top Layer w0.254: R70.1@14.478,115.697 14.478,115.57 17.17,112.878 52.545,112.878 68.965,96.458 U2.199@68.965,96.164
FPGA_LED6: R71.1 U2.198 | length 61.5
  Top Layer w0.254: R71.1@17.399,115.697 17.399,115.57 19.583,113.386 52.756,113.386 69.473,96.668 69.473,95.171 U2.198@69.466,95.164
FPGA_LED7: R72.1 U2.197 | length 58.1
  Top Layer w0.254: R72.1@20.447,115.697 20.447,115.57 22.123,113.894 52.966,113.894 69.981,96.879 U2.197@69.981,96.164
FPGA_LED8: R73.1 U2.196 | length 56.9
  Top Layer w0.203: U2.196@70.466,95.164 70.466,96.645 70.489,96.668 70.489,97.205
  Top Layer w0.254: R73.1@23.368,115.697 23.368,115.57 24.536,114.402 53.293,114.402 70.489,97.205
FPGA_RX: D15.2 R81.1 U2.7 | length 67.3
  Top Layer w0.254: v1(51.638,91.796) 53.42,90.014 U2.7@62.316,90.014
  Bottom Layer w0.254: D15.2@28.41,58.547 28.372,58.585 28.372,62.001 34.823,68.453 34.823,84.816 47.76,97.752 49.624,97.752 51.638,95.738 v1(51.638,91.796)
FPGA_TX: D14.2 R79.1 U2.5 | length 68.3
  Top Layer w0.203: v1(53.873,93.726) 56.585,91.014 U2.5@62.316,91.014
  Bottom Layer w0.203: D14.2@18.923,59.944 18.796,60.071 18.796,63.5 33.445,78.149 33.445,84.119 47.56,98.234 49.824,98.234 53.759,94.299 53.759,93.84 v1(53.873,93.726)
GND: C1.1 C2.1 C3.1 C4.1 C5.1 C6.1 C7.1 C8.1 C9.1 C10.1 C11.1 C12.1 C13.1 C14.1 C15.1 C16.1 C17.1 C18.1 C19.1 C20.1 C21.1 C23.1 C24.1 C27.1 C29.1 C30.2 C31.1 C32.2 C33.2 C34.2 C37.1 C39.2 C40.2 C41.2 C42.2 C43.2 C44.2 C45.2 C49.2 C50.2 C51.2 C52.2 C53.2 C54.1 C55.1 C56.2 C57.2 C58.2 C59.2 C60.2 C61.1 C62.2 C63.1 C64.1 C65.1 C66.1 C67.1 C68.2 C69.2 C70.2 C71.2 C72.1 C73.1 C74.1 C75.1 D1.2 D3.2 D4.2 D5.2 D6.2 D7.2 D8.2 D9.2 D10.2 J1.4 J2.5 J2.10 J2.11 J3.5 J3.6 J3.7 J3.8 J3.10 J4.2 L1.1 L3.1 LCD1.7 LCD1.23 P1.2 P1.10 P8.1 PS2.3 PS2.S Q5.2 R29.1 R33.1 R34.1 R38.1 R39.1 R62.1 R63.1 R78.1 R80.1 R85.1 R88.1 R102.2 R103.1 S1.2 S1.4 S2.2 S2.4 S3.2 S3.4 S4.2 S4.4 SW1.3 U1.11 U2.1 U2.8 U2.13 U2.25 U2.30 U2.41 U2.45 U2.46 U2.47 U2.50 U2.57 U2.59 U2.66 U2.75 U2.82 U2.91 U2.99 U2.105 U2.112 U2.118 U2.129 U2.134 U2.145 U2.151 U2.157 U2.163 U2.170 U2.179 U2.189 U2.195 U2.202 U2.206 U3.1 U3.2 U3.24 U4.16 U6.1 U7.9 U7.17 U7.29 U7.31 U8.5 U9.2 U9.4 U11.15 Y2.2 | length 1332.9
  Top Layer w0.203: D3.2@2.54,123.571 2.54,123.444 1.476,122.38 1.476,113.408 J3.5@14.58,100.305 ; PS2.S@5.436,22.708 5.638,22.91 5.638,24.762 11.635,30.759 C33.2@17.983,30.759 ; J2.5@13.384,69.192 25.931,69.192 27.356,67.767 C54.1@27.483,67.767 ; C34.2@18.009,27.889 C34.2@18.085,27.965 ; v1(26.111,29.667) 27.578,31.134 28.329,31.134 28.945,30.518 U7.31@28.945,28.599 ; C37.1@31.877,32.69 33.49,32.69 ; 33.477,39.827 33.477,36.265 33.49,36.252 33.49,32.69 ; C31.1@35.103,32.69 33.49,32.69 ; U7.17@35.473,21.195 35.531,21.195 36.765,21.195 58.623,43.053 58.623,70.8 60.838,73.014 U2.41@62.316,73.014 62.359,73.057 62.505,73.057 62.511,73.062 63.403,73.062 64.153,73.812 68.351,73.812 ; LCD1.7@48.692,80.721 55.002,87.031 57.512,87.031 57.516,87.035 58.52,87.035 58.524,87.031 62.695,87.031 62.713,87.014 64.091,87.014 66.065,85.039 v1@68.301,85.039 ; v1(51.13,109.271) 52.544,109.271 65.447,96.368 65.447,95.183 U2.206@65.466,95.164 65.466,93.186 66.66,91.992 67.824,91.992 v1@67.97,91.846 ; U2.50@62.316,68.514 62.359,68.471 62.505,68.471 62.511,68.466 63.403,68.466 63.644,68.224 65.938,68.224 v1@68.529,70.815 ; U2.47@62.316,70.014 U2.46@62.316,70.514 ; U2.45@62.316,71.014 U2.46@62.316,70.514 ; U2.30@62.316,78.514 67.49,78.514 v1@68.301,79.324 ; U2.25@62.316,81.014 67.12,81.014 v1(68.275,82.169) ; U2.8@62.316,89.514 63.673,89.514 65.38,87.808 67.222,87.808 67.5,87.53 ; U2.1@62.316,93.014 63.501,93.014 66.7,89.814 v1@68.682,89.814 ; v1@65.862,70.485 65.833,70.514 U2.46@62.316,70.514 ; U2.59@67.466,65.364 67.485,65.383 67.485,66.568 70.665,69.748 73.66,69.748 v1(74.524,70.612) ; U2.202@67.466,95.164 67.466,93.519 v1(67.843,93.142) ; v1(67.5,87.108) 67.5,87.53 ; v1@67.8,87.231 67.5,87.53 ; v1(67.97,91.992) v1@67.97,91.846 ; 68.377,91.846 v1@67.97,91.846 ; v1@68.682,89.891 68.758,89.814 v1(68.783,89.814) ; U2.66@70.966,65.364 70.966,66.673 71.914,67.621 71.916,67.621 72.358,68.064 72.358,68.066 73.99,69.698 76.175,69.698 v1@77.267,70.79 ; 71.577,70.917 69.571,70.917 66.466,67.812 U2.57@66.466,65.364 66.466,62.639 64.948,61.121 64.948,57.26 64.135,56.448 64.135,43.067 70.169,37.033 U4.16@72.768,37.033 72.768,35.26 75.148,32.88 84.289,32.88 92.884,41.474 C60.2@92.884,42.088 92.884,42.388 93.591,43.095 93.591,47.806 92.274,49.124 92.274,51.253 93.447,52.426 C61.1@93.574,52.426 ; U2.75@75.466,65.364 75.466,67.234 77.803,69.571 79.248,69.571 80.416,70.739 v1(80.67,70.739) ; C27.1@75.921,34.036 C27.1@76.175,34.036 ; U2.82@78.966,65.364 78.966,67.624 82.005,70.663 v1(83.541,70.663) ; v1@83.464,89.814 v1(83.466,89.816) U2.170@83.466,95.164 ; U2.91@83.466,65.364 83.466,68.124 v1(86.589,71.247) ; v1(86.538,80.188) 87.173,79.553 90.627,79.553 90.666,79.514 U2.129@92.116,79.514 ; v1(86.589,77.47) 89.996,74.062 91.921,74.062 91.927,74.057 92.073,74.057 U2.118@92.116,74.014 ; v1@86.589,90.551 86.626,90.514 U2.151@92.116,90.514 U2.151@92.097,90.533 ; v1(86.662,82.014) U2.134@92.116,82.014 94.001,82.014 102.612,90.626 102.616,90.626 103.086,91.095 103.086,92.126 104.381,93.421 LCD1.23@104.572,93.421 ; v1(86.766,68.453) 87.466,67.753 U2.99@87.466,65.364 ; v1(86.766,74.27) 90.022,71.014 U2.112@92.116,71.014 ; v1@86.817,69.825 v1(86.868,69.774) 87.605,69.774 89.864,67.514 U2.105@92.116,67.514 ; v1(86.828,86.57) 89.313,86.57 90.257,87.514 U2.145@92.116,87.514 ; U2.163@86.966,95.164 86.966,92.478 v1(86.639,92.151) 87.986,92.151 89.647,93.812 89.653,93.812 89.918,94.077 89.918,94.083 89.966,94.132 U2.157@89.966,95.164 ; R33.1@126.746,123.952 136.2,114.498 136.2,103.149 ; v1(138.201,102.997) 136.353,102.997 136.2,103.149 ; v1(138.354,75.609) 138.354,73.389 140.089,71.653 142.544,71.653 143.196,71.002 143.196,69.765 U9.4@142.544,69.113 ; v1(138.405,90.907) 138.405,100.355 137.572,101.188 U3.2@136.2,101.188 U3.1@136.2,102.458 136.2,103.149 ; v1@139.979,69.596 139.992,69.583 140.274,69.583 140.744,69.113 U9.4@142.544,69.113 ; U3.24@144.6,102.458 148.215,102.458 148.26,102.413 154.711,108.864 ; P1.2@154.711,111.201 154.711,108.864 ; P1.10@154.711,121.361 156.464,123.114 158.572,123.114 159.182,122.504 159.182,109.296 158.445,108.56 155.016,108.56 154.711,108.864 ; P8.1@157.836,65.608 157.759,65.684 145.973,65.684 U9.4@142.544,69.113
  Top Layer w0.254: D3.2@2.54,123.571 2.616,123.647 D9.2@20.765,123.647 20.841,123.571 D10.2@23.622,123.571 ; J1.4@12.497,37.668 12.497,37.541 13.703,36.335 15.354,36.335 15.799,36.779 18.059,36.779 C30.2@18.085,36.754 C34.2@18.085,27.965 ; U11.15@25.527,57.15 25.643,57.266 26.354,57.266 29.127,60.039 29.127,66.25 27.788,67.589 C54.1@27.457,67.589 ; U11.15@26.365,57.15 26.924,57.15 28.445,55.629 28.445,45.51 U8.5@27.994,45.06 ; U8.5@27.457,45.06 U8.5@27.994,45.06 ; U7.9@28.145,19.517 28.209,19.581 28.209,20.356 28.653,20.8 28.653,21.046 v1(28.758,21.151) ; U7.31@28.945,28.599 28.945,26.542 30.182,25.305 32.036,25.305 v1(32.893,26.162) 32.798,26.257 32.112,26.257 30.609,27.76 30.609,28.535 U7.29@30.545,28.599 ; S1.2@30.963,2.032 33.807,4.877 44.025,4.877 ; v1(35.44,20.583) 35.44,21.105 U7.17@35.531,21.195 ; v1@36.779,29.769 36.779,29.82 38.478,31.518 38.478,36.373 35.024,39.827 33.477,39.827 32.737,40.567 29.753,40.567 29.013,41.308 29.013,44.165 28.118,45.06 U8.5@27.994,45.06 ; S2.2@44.298,2.032 44.025,2.305 44.025,4.877 ; S3.2@57.379,2.032 57.379,4.877 ; S4.2@70.46,2.032 67.615,4.877 57.379,4.877 ; v1(70.942,89.738) 70.966,89.762 U2.195@70.966,95.164 ; U4.16@72.768,37.033 74.193,37.033 75.54,35.687 75.54,34.544 76.048,34.036 C27.1@76.175,34.036 ; U2.189@73.966,95.164 U2.189@73.966,95.164 v1(73.965,89.916) v1@73.99,89.891 ; U2.179@78.966,95.164 78.969,95.161 78.969,93.675 79.483,93.16 79.483,90.544 80.289,89.738 v1@80.416,89.738 ; v1(142.138,102.921) 142.286,102.921 142.749,102.458 U3.24@144.6,102.458 ; 44.025,4.877 57.379,4.877
  Top Layer w1: v2(132.613,23.012) 136.55,23.012 138.013,21.549 v2(138.013,17.569) 138.013,14.31 139.548,12.776 152.375,12.776 SW1.3@157.074,17.475
  Bottom Layer w0.203: PS2.S@5.436,22.708 5.686,22.708 8.936,19.458 PS2.3@9.186,19.458 ; J2.11@11.964,76.147 14.893,79.076 14.893,87.164 J3.6@12.04,90.018 J3.8@12.04,94.59 10.833,95.796 10.833,97.955 13.183,100.305 J3.5@14.58,100.305 ; v1(18.11,27.965) 24.79,27.965 26.111,29.286 v1(26.111,29.667) ; v1(32.893,26.162) C39.2@32.944,26.111 ; v1(35.44,20.583) C40.2@35.559,20.702 ; LCD1.7@48.692,80.721 50.317,79.096 50.317,53.746 50.47,53.594 ; v1(51.13,109.271) 56.832,114.973 63.589,114.973 R29.1@64.897,113.665 76.83,125.598 76.83,141.483 U6.1@75.692,142.621 ; C1.1@51.765,54.991 51.765,54.889 50.47,53.594 ; D1.2@54.241,42.52 54.216,42.545 51.689,42.545 50.47,43.764 50.47,46.114 ; C75.1@54.585,54.585 54.585,53.061 54.305,52.781 54.305,49.301 53.467,48.463 50.47,48.463 ; U1.11@58.093,46.101 U1.11@58.129,46.137 50.493,46.137 50.47,46.114 ; C24.1@138.1,102.921 142.113,102.921 C23.1@142.24,102.794 ; v1(138.405,90.907) 138.405,87.3 136.576,85.471 133.452,85.471 131.47,83.49 131.47,77.953 v1(139.725,69.698) ; R38.1@140.36,69.342 140.36,66.599 141.224,65.735 143.297,65.735 150.724,58.309 150.724,57.404 150.733,57.394 150.733,55.413 R39.1@151.232,54.915 151.232,34.29 J4.2@152.298,33.223 ; 50.47,46.114 50.47,48.463 ; 50.47,48.463 50.47,53.594
  Bottom Layer w0.254: J2.10@11.964,51.157 12.31,50.811 12.31,44.529 11.29,43.51 11.29,39.002 12.497,37.795 J1.4@12.497,37.668 ; J2.11@11.964,76.147 11.964,70.612 J2.5@13.384,69.192 ; v1(28.758,21.151) 29.121,21.514 30.399,21.514 30.78,21.895 32.944,21.895 ; S1.2@30.963,2.032 S1.4@30.963,14.732 ; v1(32.893,26.162) 33.02,26.162 36.805,29.947 v1(36.906,29.947) ; C39.2@32.944,26.111 32.944,21.895 ; S2.2@44.298,2.032 S2.4@44.298,14.732 ; S3.2@57.379,2.032 S3.4@57.379,14.732 ; S4.2@70.46,2.032 S4.4@70.46,14.732 66.624,18.567 37.44,18.567 35.814,20.193 35.814,20.447 35.559,20.702 35.255,21.006 33.833,21.006 32.944,21.895 ; v1@75.768,33.909 C55.1@75.768,20.041 75.844,19.964 R78.1@75.844,17.12 ; v2(138.013,17.569) Q5.2@138.028,17.555
  Bottom Layer w1: C72.1@65.862,70.79 C64.1@68.809,70.79 ; v1(67.5,87.108) C8.1@68.209,87.108 ; C6.1@67.843,92.885 67.97,92.758 v1(67.97,91.992) ; v1(67.843,93.142) 68.1,93.142 C6.1@68.209,93.25 ; v1@68.067,92.089 68.209,91.948 C7.1@68.209,90.456 68.783,89.882 v1(68.783,89.814) ; C21.1@86.69,92.202 86.766,92.126 C20.1@86.766,89.84 ; C73.1@86.766,68.478 C14.1@86.766,71.298 ; C20.1@86.766,89.256 83.949,89.256 83.466,89.738 C2.1@81.915,89.738 C4.1@75.743,89.738 C5.1@72.466,89.738 v1(70.942,89.738) 68.859,89.738 v1(68.783,89.814) ; C19.1@86.828,86.419 86.601,86.192 86.601,83.371 86.766,83.206 86.766,80.231 86.665,80.231 86.665,77.453 86.766,77.453 86.716,77.402 86.716,74.32 v1(86.766,74.27) C14.1@86.766,71.298 ; R103.1@132.486,23.012 v2(132.613,23.012) ; J4.2@152.298,33.223 J4.2@153.187,33.223 155.245,33.223 158.852,29.616 158.852,19.346 157.074,17.568 SW1.3@157.074,17.475 ; C8.1@68.209,87.108 68.209,89.433 68.59,89.814 v1(68.783,89.814) ; C8.1@68.209,87.108 68.209,71.39 C64.1@68.809,70.79 ; C64.1@68.809,70.79 C63.1@71.603,70.79 86.258,70.79 C14.1@86.766,71.298
  Bottom Layer w1.5: S4.2@70.46,2.032 75.768,2.032 76.048,2.311 C43.2@79.121,2.311 ; C43.2@79.236,2.323 79.756,2.843 80.108,2.843 81.915,4.651 R63.1@81.915,8.23 81.927,8.218 85.026,8.218 85.09,8.153 R88.1@117.475,8.153 C59.2@120.396,8.153 C58.2@123.317,8.153 126.353,8.153 127.559,8.153 ; R103.1@132.69,23.012 132.69,10.947 133.059,10.578 133.059,8.216 C69.2@133.071,8.204 133.071,8.177 133.059,8.165 129.171,8.165 C57.2@129.159,8.153 127.559,8.153 ; R85.1@133.147,2.616 133.135,2.604 132.636,2.604 132.495,2.464 128.143,2.464 127.559,3.048 127.559,8.153
  other v1: 75.997,33.757 76.962,70.612 65.659,70.663 68.402,70.968 71.145,70.968 67.843,73.736 68.097,79.299 68.097,85.09 80.213,89.814 86.817,90.653
GREEN: R75.1 U2.3 | length 46
  Top Layer w0.203: R75.1@20.066,94.361 20.193,94.361 23.558,97.727 51.588,97.727 57.301,92.014 U2.3@62.316,92.014
HSYNC: J3.13 R44.1 U2.168 | length 137.5
  Top Layer w0.203: U2.168@84.466,95.164 84.466,103.059 v1@86.639,105.232 ; v1(86.59,105.332) 86.59,105.282 v1@86.639,105.232 ; R44.1@108.839,123.952 108.839,122.885 104.978,119.024 100.432,119.024 86.69,105.283 86.69,105.232 v1@86.639,105.232
  Bottom Layer w0.203: J3.13@9.5,95.733 7.836,97.396 7.836,108.445 10.668,111.277 45.576,111.277 51.501,105.353 86.57,105.353 v1(86.59,105.332)
LCD_D0: R41.1 U2.171 | length 37.8
  Top Layer w0.203: U2.171@82.966,95.164 82.966,103.923 99.185,120.142 100.127,120.142 102.997,123.012 R41.1@102.997,124.079
LCD_D1: J3.14 R42.1 U2.169 | length 130.5
  Top Layer w0.203: U2.169@83.966,95.164 83.966,103.854 84.645,104.534 84.645,104.661 84.772,104.661 99.797,119.685 102.718,119.685 105.918,122.885 R42.1@105.918,123.952
  Bottom Layer w0.203: J3.14@9.5,98.019 8.293,99.225 8.293,108.256 10.858,110.82 44.591,110.82 50.814,104.597 v1(84.709,104.597)
LCD_D3: R45.1 U2.167 | length 43.4
  Top Layer w0.203: U2.167@84.966,95.164 84.966,102.64 100.893,118.567 106.502,118.567 111.887,123.952 R45.1@111.887,124.079
LCD_D4: R46.1 U2.166 | length 45.6
  Top Layer w0.203: U2.166@85.466,95.164 85.466,102.493 96.748,113.775 104.758,113.775 114.808,123.825 R46.1@114.808,123.952
LCD_D5: R48.1 U2.165 | length 48.2
  Top Layer w0.203: U2.165@85.966,95.164 85.966,102.347 96.937,113.318 107.476,113.318 117.983,123.825 R48.1@117.983,123.952
LCD_D6: R49.1 U2.162 | length 50.3
  Top Layer w0.203: U2.162@87.466,95.164 87.466,97.37 87.458,97.379 87.458,103.192 97.127,112.861 110.067,112.861 121.031,123.825 R49.1@121.031,123.952
LCD_D7: R50.1 U2.161 | length 52.5
  Top Layer w0.203: U2.161@87.966,95.164 87.966,97.517 87.966,103.054 97.316,112.404 112.404,112.404 123.825,123.825 R50.1@123.825,123.952
LCD_E: R37.1 U2.172 | length 36.2
  Top Layer w0.203: U2.172@82.466,95.164 82.466,104.069 100.076,121.679 R37.1@100.076,124.079
LCD_R/W: R36.1 U2.175 | length 35.6
  Top Layer w0.203: U2.175@80.966,95.164 80.966,97.162 80.88,97.248 80.88,103.13 97.028,119.278 R36.1@97.028,124.079
LCD_RS: R35.1 U2.176 | length 34.5
  Top Layer w0.203: U2.176@80.466,95.164 80.466,97.016 80.423,97.059 80.423,103.319 93.98,116.877 R35.1@93.98,124.079
NetC25_1: C25.1 U5.5 | length 1.6
  Top Layer w0.203: U5.5@138.569,78.156 139.334,78.156 139.67,78.491 139.67,78.532 139.903,78.765
  other v1: 140.314,78.884
NetC25_2: C25.2 C26.1 R10.2 | length 7.4
  Bottom Layer w0.254: R10.2@136.169,80.721 139.725,80.721 C25.2@139.852,80.848 141.859,80.848 142.697,81.686 C26.1@143.205,81.686
NetC28_1: C28.1 U5.1 | length 2.9
  Top Layer w0.203: U5.1@133.669,81.966 133.669,82.767 v1(135.153,84.252)
NetC28_2: C28.2 U5.8 | length 3
  Top Layer w0.203: 137.389,84.48 138.569,83.3 U5.8@138.569,81.966
  other v1: 137.389,84.074